# Altium PCB Tigershark-Panel.PcbDoc
Units mil, origin at the board's own origin, x right, y up, seen from the top; angles counter-clockwise.
Board outline 6013.97 x 9713.77 mil, 4 copper layers (Top Layer, Groun Plane, Power Plane, Bottom Layer), stack 64.208 mil thick; 8 components, 0 nets, 12 pads, 0 vias.
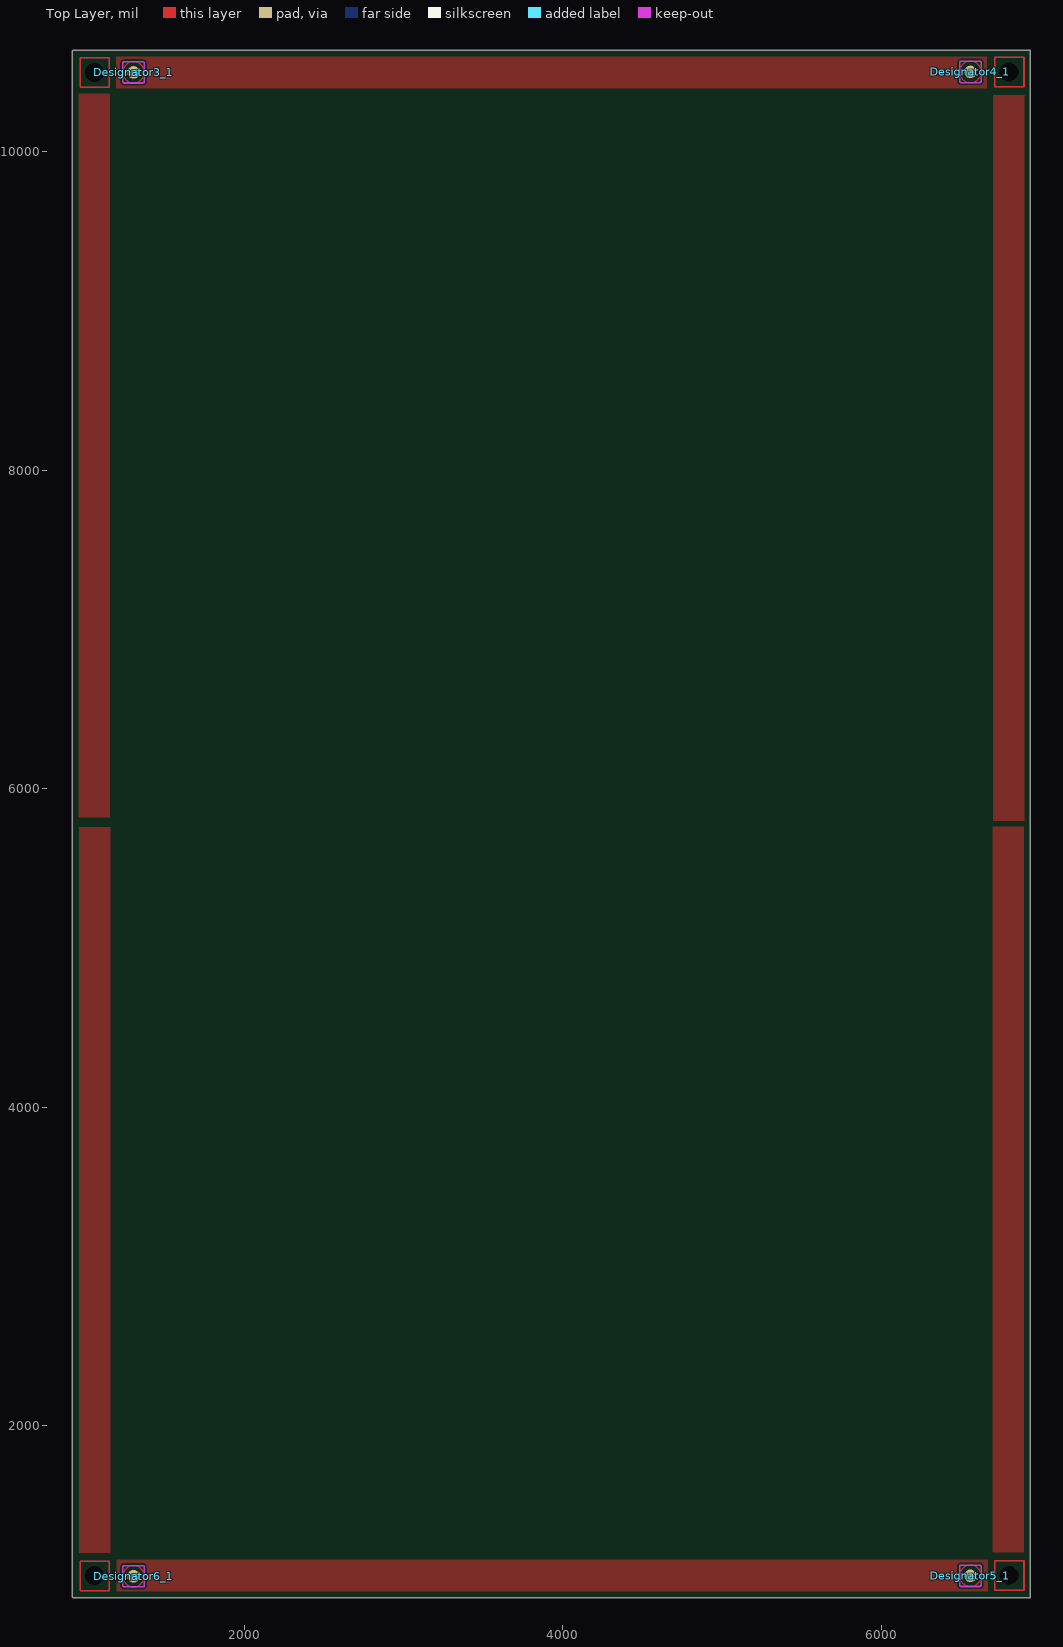
[diagram p0: Top Layer view]
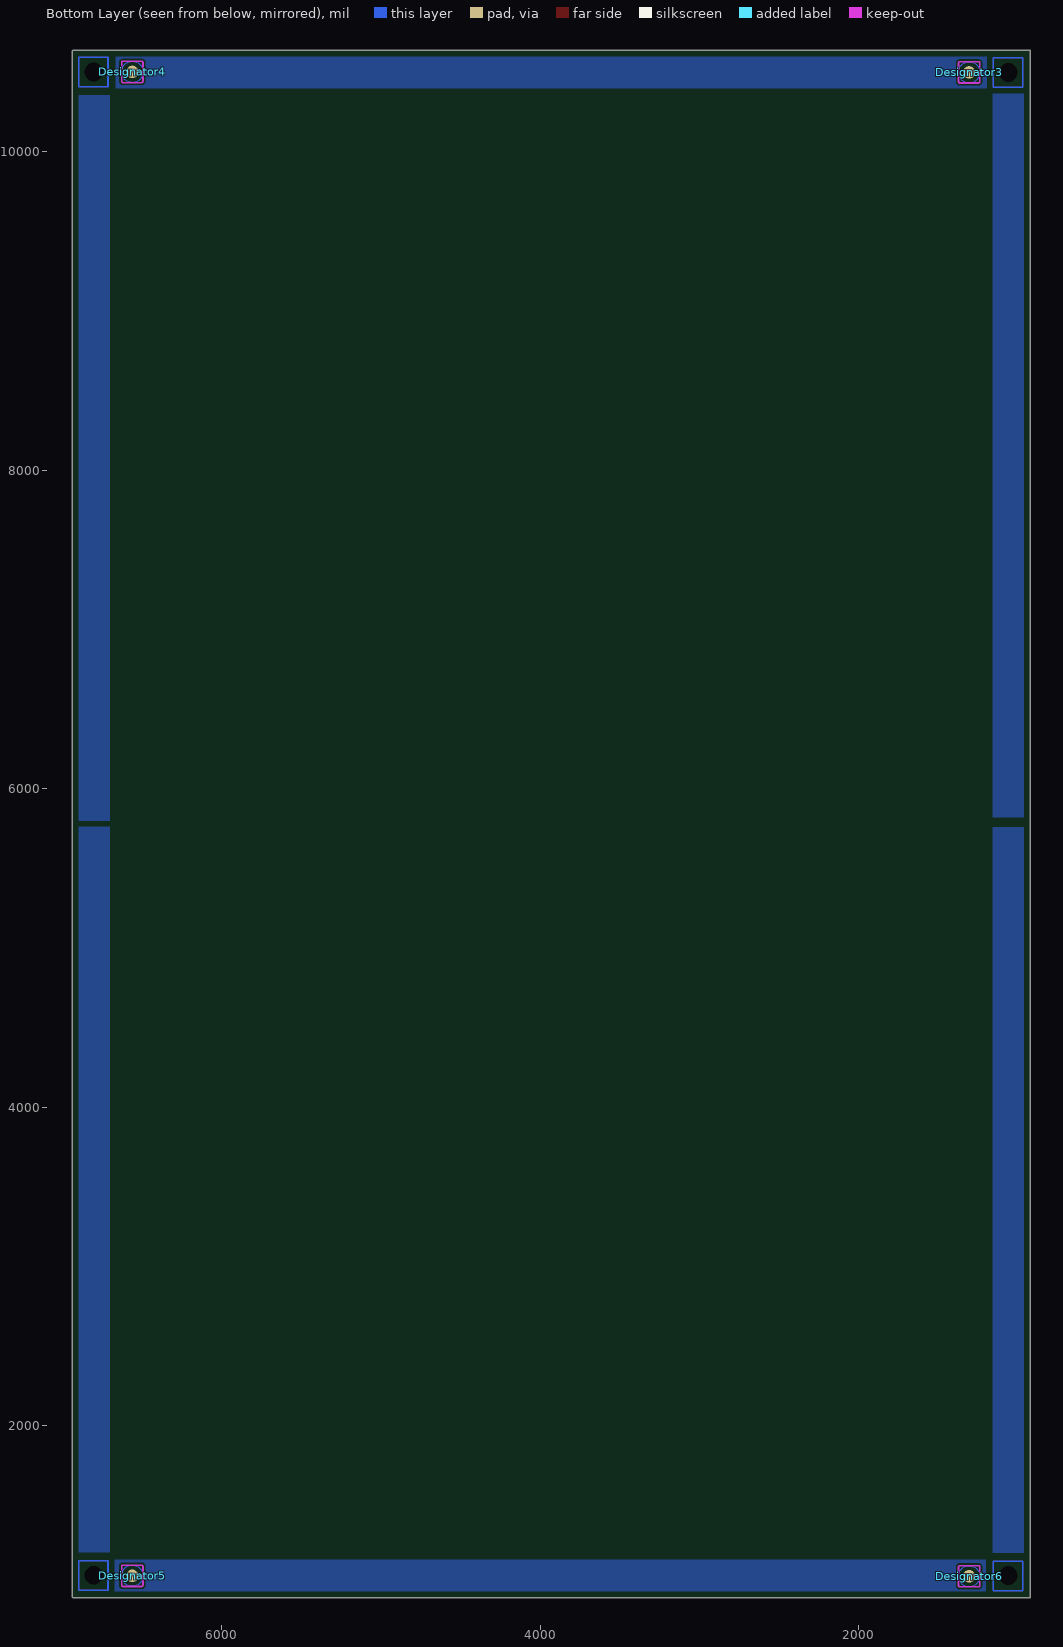
[diagram p1: Bottom Layer view, seen from below]
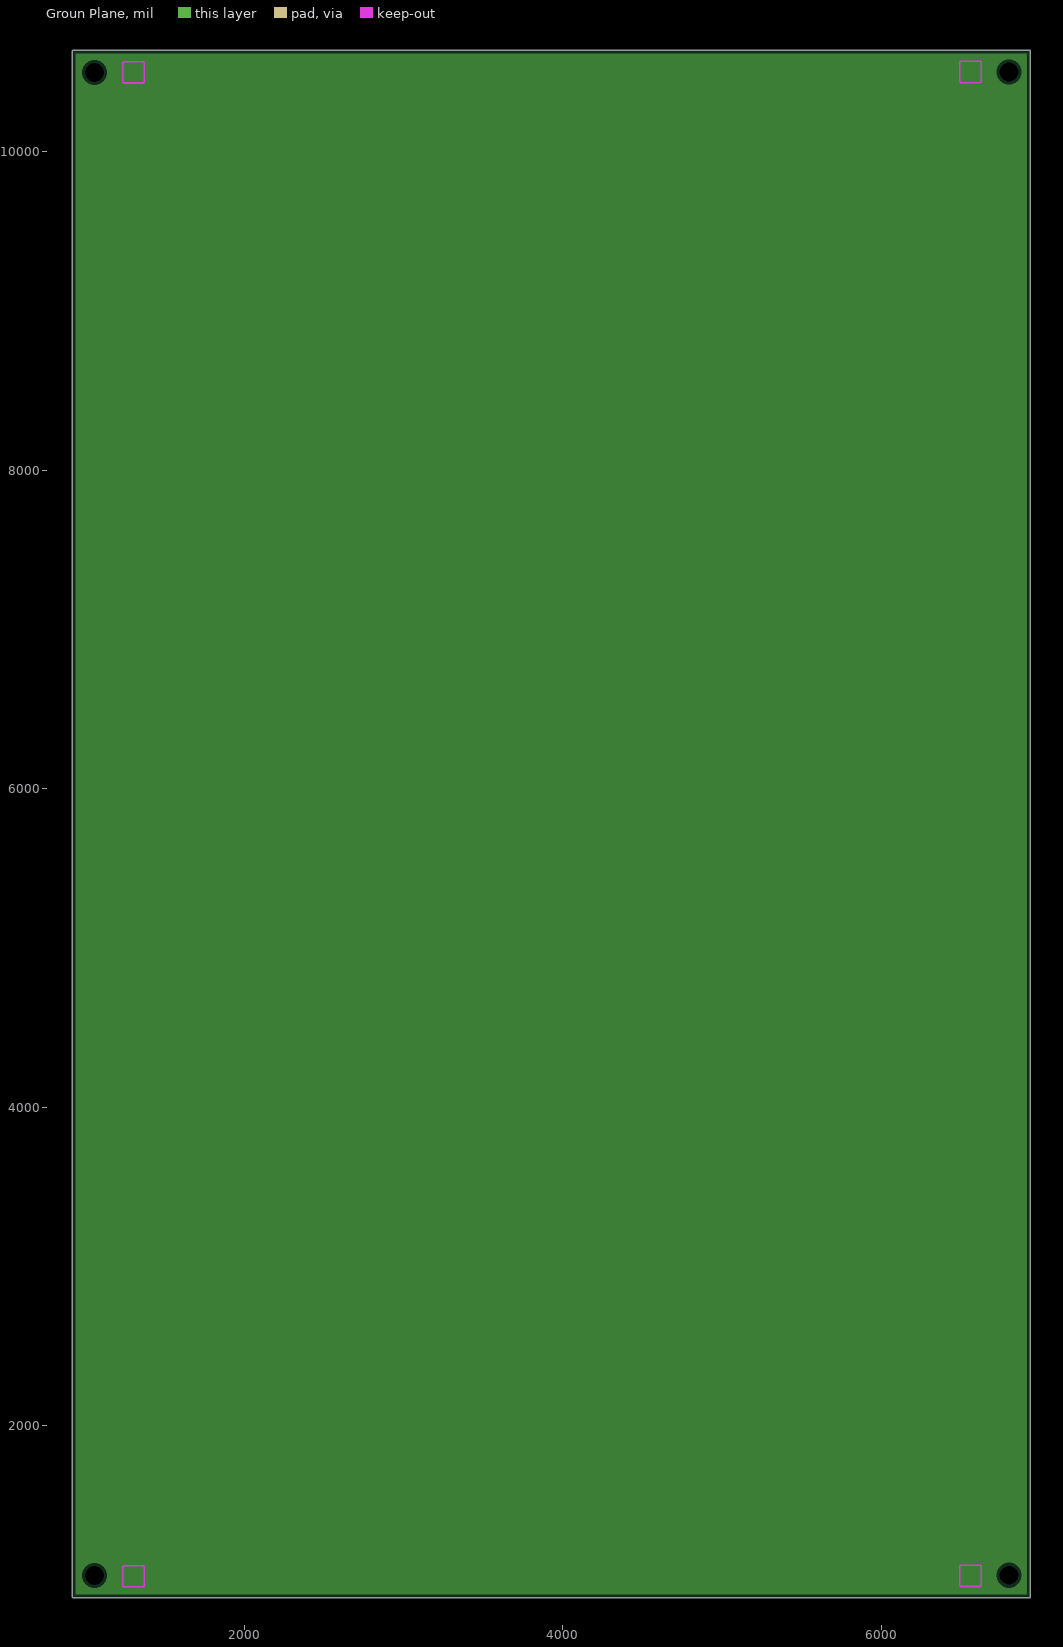
[diagram p2: Groun Plane, clearances drawn from the general rule]
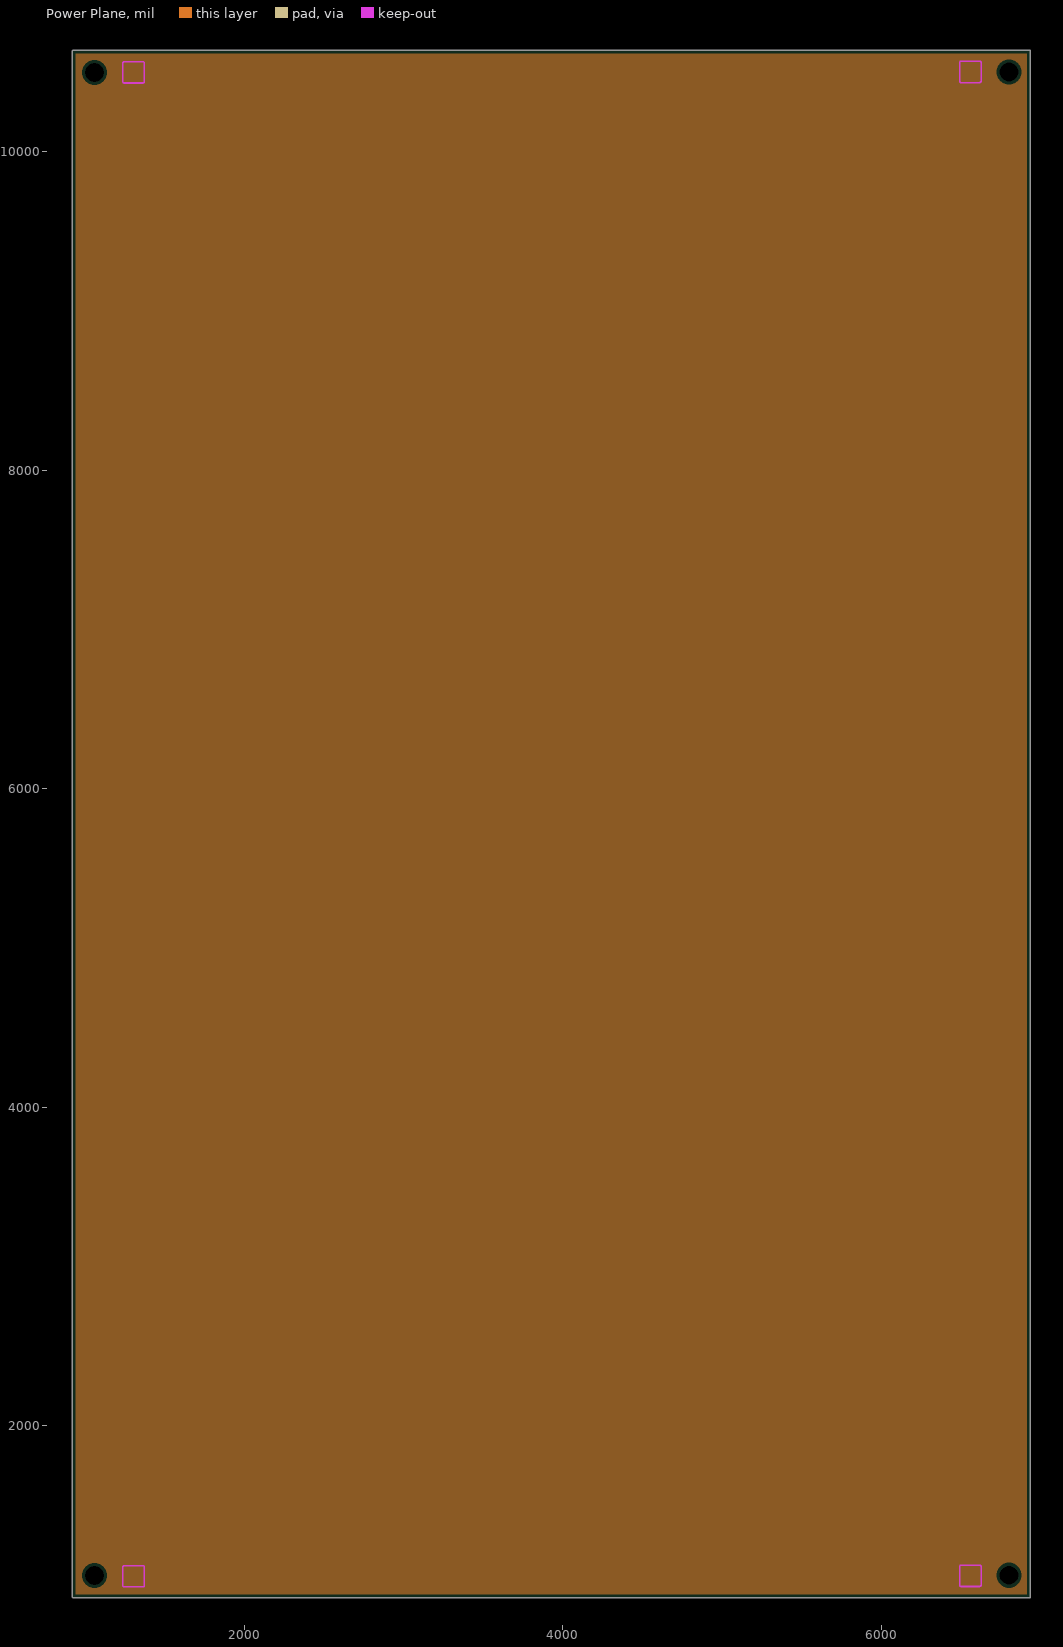
[diagram p3: Power Plane, clearances drawn from the general rule]

## Layer stack, top to bottom
Top Solder: solder mask 0.4, Solder Resist, Dk 3.5
Top Layer: signal copper 2.75
Dielectric1: core 21.654, FR-4, Dk 4.8
Groun Plane: plane copper 1.4
Dielectric2: prepreg 12.6, FR-4, Dk 4.3
Power Plane: plane copper 1.4
Dielectric3: core 21.654, FR-4, Dk 4.8
Bottom Layer: signal copper 2.75
Bottom Solder: solder mask 0.4, Solder Resist, Dk 3.5

## Board outline
927.17,922.15 cw(c927.17,927.17) 922.15,927.17 922.15,10630.91 cw(c927.17,10630.91) 927.17,10635.92 6931.1,10635.92 cw(c6931.1,10630.91) 6936.12,10630.91 6936.12,930.12 cw(c6931.1,930.12) 6935.9,928.64 cw(c6931.1,927.17) 6936.12,927.17 cw(c6931.1,927.17) 6931.1,922.15

## Design rules (kind name [scope] priority, off if disabled: settings)
Clearance [All] p1: gap=10
PlaneClearance [All] p1: clearance=20
PlaneConnect [All] p1: planeconnectstyle=Relief reliefexpansion=20 reliefentries=4 reliefconductorwidth=10 reliefairgap=10
PolygonConnect [All] p1: connectstyle=Relief reliefconductorwidth=10 reliefentries=4 polygonreliefangle="90 Angle" airgapwidth=10
RoutingVias [All] p1: holewidth=28 width=50 viastyle="Through Hole" minholewidth=28 minwidth=50 maxholewidth=28 maxwidth=50
SolderMaskExpansion [All] p1: expansion=4
Width [All] p1: maxlimit=10 minlimit=10 preferedwidth=10
27 further rules are at their usual default settings.

## Components (designator, comment, footprint, x,y, rotation, side; value= is the part's Value field where it differs from the comment)
Designator3 "Comment" FIDUCIAL-2X3-PANEL 1306.1,10498.03 r90 bottom
Designator3_1 "Comment" FIDUCIAL-2X3-PANEL 1306.1,10498.03 r90 top
Designator4 "Comment" FIDUCIAL-2X3-PANEL 6560.04,10500.98 r90 bottom
Designator4_1 "Comment" FIDUCIAL-2X3-PANEL 6560.04,10500.98 r90 top
Designator5 "Comment" FIDUCIAL-2X3-PANEL 6560.04,1059.06 r90 bottom
Designator5_1 "Comment" FIDUCIAL-2X3-PANEL 6560.04,1059.06 r90 top
Designator6 "Comment" FIDUCIAL-2X3-PANEL 1306.1,1056.1 r90 bottom
Designator6_1 "Comment" FIDUCIAL-2X3-PANEL 1306.1,1056.1 r90 top

## Footprints (in the part's own frame and the unit in brackets; to place one, negate y for a bottom-side part, rotate by r counter-clockwise, add the part's x,y. Pads: shape width x height; smd on the part's side, far side on the other; paste and mask are expansions set on the pad)
FIDUCIAL-2X3-PANEL [mm]
  rrect100% 2x2 smd paste+0 mask+0.508: 1(0,0)
  Top Layer circle w0.178: c0,0 r1.7
  Keep-Out Layer lines w0.254: -1.5,-1.7 cw(c-1.5,-1.5) -1.7,-1.5 -1.7,1.5 cw(c-1.5,1.5) -1.5,1.7 1.5,1.7 cw(c1.5,1.5) 1.7,1.5 1.7,-1.5 cw(c1.5,-1.5) 1.5,-1.7 -1.5,-1.7
  body extent -1.01,-1.01 1.02,1.01, height 0.02

## Free pads (board coordinates)
  round 0 hole 118.11 unplated paste-3897.64 mask-4.02: 0(1060.04,1060.04) 1(6802.17,1062.99) 2(6802.17,10500.98) 3(1060.04,10498.03)

## Nets (pads, with @x,y where several pads share a name; then routed paths per layer and width w, separated by ;. In a path a pad name is that pad's centre, name@x,y a point inside that pad or via, vN(x,y) a via of type N, cw(c..) or ccw(c..) an arc to the next point about the centre after c; other vN are vias at no path point)
pads on no net: Designator3.1 Designator3_1.1 Designator4.1 Designator4_1.1 Designator5.1 Designator5_1.1 Designator6.1 Designator6_1.1
copper on no net: | length 5921.3
  Top Layer w10: 970.47,965.55 1154.53,965.55 1154.53,1151.57 970.47,1151.57 970.47,965.55 ; 970.47,10403.54 1154.53,10403.54 1154.53,10589.57 970.47,10589.57 970.47,10403.54 ; 6712.6,968.5 6896.65,968.5 6896.65,1154.53 6712.6,1154.53 6712.6,968.5 ; 6712.6,10406.5 6896.65,10406.5 6896.65,10592.52 6712.6,10592.52 6712.6,10406.5
  Bottom Layer w10: 970.47,965.55 1154.53,965.55 1154.53,1151.57 970.47,1151.57 970.47,965.55 ; 970.47,10403.54 1154.53,10403.54 1154.53,10589.57 970.47,10589.57 970.47,10403.54 ; 6712.6,968.5 6896.65,968.5 6896.65,1154.53 6712.6,1154.53 6712.6,968.5 ; 6712.6,10406.5 6896.65,10406.5 6896.65,10592.52 6712.6,10592.52 6712.6,10406.5

## Polygon pours and split planes (outlines as drawn)
no net on Top Layer "Frame-Copper" (solid, pour order 31): 6896.65,10353.35 6896.65,5800.2 6944.88,5800.2 6702.76,5800.2 6702.76,10353.35
no net on Top Layer "Frame-Copper" (solid, pour order 31): 6895.67,5760.83 6895.67,1207.68 6943.9,1207.68 6701.77,1207.68 6701.77,5760.83
no net on Top Layer "Frame-Copper" (solid, pour order 33): 1158.46,5760 1158.46,1204.72 1206.69,1204.72 964.57,1204.72 964.57,5760
no net on Top Layer "Frame-Copper" (solid, pour order 21): 1196.85,10397.64 6662.4,10397.64 6662.4,10597.44 1196.85,10597.44
no net on Top Layer "Frame-Copper" (solid, pour order 27): 1200.79,960.63 6669.29,960.63 6669.29,1160.43 1200.79,1160.43
no net on Top Layer "Frame-Copper" (solid, pour order 36): 1156.5,10363.19 1156.5,5820 1204.72,5820 962.6,5820 962.6,10363.19
no net on Bottom Layer "Frame-Copper" (solid, pour order 31): 6895.67,5760.83 6895.67,1207.68 6943.9,1207.68 6701.77,1207.68 6701.77,5760.83
no net on Bottom Layer "Frame-Copper" (solid, pour order 31): 6896.65,10353.35 6896.65,5800.2 6944.88,5800.2 6702.76,5800.2 6702.76,10353.35
no net on Bottom Layer "Frame-Copper" (solid, pour order 21): 1196.85,10397.64 6662.4,10397.64 6662.4,10597.44 1196.85,10597.44
no net on Bottom Layer "Frame-Copper" (solid, pour order 36): 1156.5,10363.19 1156.5,5820 1204.72,5820 962.6,5820 962.6,10363.19
no net on Bottom Layer "Frame-Copper" (solid, pour order 33): 1158.46,5760 1158.46,1204.72 1206.69,1204.72 964.57,1204.72 964.57,5760
no net on Bottom Layer "Frame-Copper" (solid, pour order 27): 1200.79,960.63 6669.29,960.63 6669.29,1160.43 1200.79,1160.43
no net on Groun Plane (split plane): 6916.02,942.25 942.25,942.25 942.25,10615.82 6916.02,10615.82
no net on Power Plane (split plane): 6916.02,942.25 942.25,942.25 942.25,10615.82 6916.02,10615.82

## Silkscreen, mask and mechanical layers (free items; w line width, h text height)
Mechanical 2:
  drawing of 347 lines, arcs and shapes, not listed
  text "Notes" at 12559.8,8996.26 h60
  text "Layer" at 8025.93,8988.03 h60
  text "Name" at 8435.84,8988.03 h60
  text "Material" at 9365.59,8988.03 h60
  text "Thickness" at 10225.35,8988.03 h60
  text "Constant" at 10875.19,8988.03 h60
  text "Board Layer Stack" at 11445.05,8988.03 h60
  text "File" at 7719.8,8976.26 h60
  text "1" at 8025.93,8868.03 h60
  text "Top Paste" at 8435.84,8868.03 h60
  text "GTP" at 7739.8,8856.26 h60
  text "2" at 8025.93,8748.03 h60
  text "Top Overlay" at 8435.84,8748.03 h60
  text "GTO" at 7739.8,8736.26 h60
  text "3" at 8025.93,8628.03 h60
  text "Top Solder" at 8435.84,8628.03 h60
  text "Solder Resist" at 9365.59,8628.03 h60
  text "0.010mm" at 10225.35,8628.03 h60
  text "3.5" at 10875.19,8628.03 h60
  text "GTS" at 7739.8,8616.26 h60
  text "4" at 8025.93,8508.03 h60
  text "Top Layer" at 8435.84,8508.03 h60
  text "Copper" at 9365.59,8508.03 h60
  text "0.070mm" at 10225.35,8508.03 h60
  text "GTL" at 7739.8,8496.26 h60
  text "5" at 8025.93,8388.03 h60
  text "Dielectric1" at 8435.84,8388.03 h60
  text "FR-4" at 9365.59,8388.03 h60
  text "0.550mm" at 10225.35,8388.03 h60
  text "4.8" at 10875.19,8388.03 h60
  text "Negative Layer" at 12539.8,8276.26 h60
  text "6" at 8025.93,8268.03 h60
  text "Groun Plane" at 8435.84,8268.03 h60
  text "Copper" at 9365.59,8268.03 h60
  text "0.036mm" at 10225.35,8268.03 h60
  text "GP1" at 7739.8,8256.26 h60
  text "7" at 8025.93,8148.03 h60
  text "Dielectric2" at 8435.84,8148.03 h60
  text "FR-4" at 9365.59,8148.03 h60
  text "0.320mm" at 10225.35,8148.03 h60
  text "4.3" at 10875.19,8148.03 h60
  text "8" at 8025.93,8028.03 h60
  text "Power Plane" at 8435.84,8028.03 h60
  text "Copper" at 9365.59,8028.03 h60
  text "0.036mm" at 10225.35,8028.03 h60
  text "G1" at 7739.8,8016.26 h60
  text "9" at 8025.93,7908.03 h60
  text "Dielectric3" at 8435.84,7908.03 h60
  text "FR-4" at 9365.59,7908.03 h60
  text "0.550mm" at 10225.35,7908.03 h60
  text "4.8" at 10875.19,7908.03 h60
  text "GBL" at 7739.8,7796.26 h60
  text "10" at 8025.93,7788.03 h60
  text "Bottom Layer" at 8435.84,7788.03 h60
  text "Copper" at 9365.59,7788.03 h60
  text "0.070mm" at 10225.35,7788.03 h60
  text "11" at 8025.93,7668.03 h60
  text "Bottom Solder" at 8435.84,7668.03 h60
  text "Solder Resist" at 9365.59,7668.03 h60
  text "0.010mm" at 10225.35,7668.03 h60
  text "3.5" at 10875.19,7668.03 h60
  text "GBS" at 7739.8,7656.26 h60
  text "12" at 8025.93,7548.03 h60
  text "Bottom Overlay" at 8435.84,7548.03 h60
  text "13" at 8025.93,7428.03 h60
  text "Bottom Paste" at 8435.84,7428.03 h60
Drill Drawing:
  drawing of 158 lines, arcs and shapes, not listed
  text "Symbol" at 8004.97,7024.61 h72
  text "Hit Count" at 8510.85,7024.61 h72
  text "Finished Hole Size" at 9208.66,7024.61 h72
  text "Plated" at 10554.27,7024.61 h72
  text "Hole Type" at 11060.14,7024.61 h72
  text "4" at 8510.85,6874.61 h60
  text "0.900mm (35.43mil)" at 9208.66,6874.61 h60
  text "PTH" at 10554.27,6874.61 h60
  text "Round" at 11060.14,6874.61 h60
  text "4" at 8510.85,6724.61 h60
  text "1.499mm (59.00mil)" at 9208.66,6724.61 h60
  text "PTH" at 10554.27,6724.61 h60
  text "Round" at 11060.14,6724.61 h60
  text "4" at 8510.85,6574.61 h60
  text "2.210mm (87.00mil)" at 9208.66,6574.61 h60
  text "PTH" at 10554.27,6574.61 h60
  text "Round" at 11060.14,6574.61 h60
  text "4" at 8510.85,6424.61 h60
  text "3.000mm (118.11mil)" at 9208.66,6424.61 h60
  text "NPTH" at 10554.27,6424.61 h60
  text "Round" at 11060.14,6424.61 h60
  text "8" at 8510.85,6274.61 h60
  text "0.965mm (38.00mil)" at 9208.66,6274.61 h60
  text "PTH" at 10554.27,6274.61 h60
  text "Round" at 11060.14,6274.61 h60
  text "20" at 8510.85,6124.61 h60
  text "0.711mm (28.00mil)" at 9208.66,6124.61 h60
  text "PTH" at 10554.27,6124.61 h60
  text "Round" at 11060.14,6124.61 h60
  text "28" at 8510.85,5974.61 h60
  text "1.397mm (55.00mil)" at 9208.66,5974.61 h60
  text "PTH" at 10554.27,5974.61 h60
  text "Round" at 11060.14,5974.61 h60
  text "32" at 8510.85,5824.61 h60
  text "2.540mm (100.00mil)" at 9208.66,5824.61 h60
  text "PTH" at 10554.27,5824.61 h60
  text "Round" at 11060.14,5824.61 h60
  text "38" at 8510.85,5674.61 h60
  text "0.508mm (20.00mil)" at 9208.66,5674.61 h60
  text "PTH" at 10554.27,5674.61 h60
  text "Round" at 11060.14,5674.61 h60
  text "104" at 8510.85,5524.61 h60
  text "1.016mm (40.00mil)" at 9208.66,5524.61 h60
  text "PTH" at 10554.27,5524.61 h60
  text "Round" at 11060.14,5524.61 h60
  text "120" at 8510.85,5374.61 h60
  text "0.559mm (22.00mil)" at 9208.66,5374.61 h60
  text "PTH" at 10554.27,5374.61 h60
  text "Round" at 11060.14,5374.61 h60
  text "150" at 8510.85,5224.61 h60
  text "0.200mm (7.87mil)" at 9208.66,5224.61 h60
  text "PTH" at 10554.27,5224.61 h60
  text "Round" at 11060.14,5224.61 h60
  text "2258" at 8510.85,5074.61 h60
  text "0.381mm (15.00mil)" at 9208.66,5074.61 h60
  text "PTH" at 10554.27,5074.61 h60
  text "Round" at 11060.14,5074.61 h60
  text "2774 Total" at 8510.85,4924.61 h60
Mechanical 30:
  lines w10: 942.91,942.91 942.91,7064.96 ; 6931.1,927.17 927.17,927.17 927.17,10630.91 6931.1,10630.91 6931.1,930.12
Mechanical 31:
  lines w10: 927.17,1177.17 6930.12,1177.17 ; 927.17,5781.1 6931.1,5781.1 ; 930.12,10380.91 6936.02,10380.91 ; 1177.17,931.1 1177.17,10630.91 ; 6681.1,931.1 6681.1,10630.91

## Dimensions
927.17,927.17 to 6931.1,927.17 on Mechanical 16
6931.1,930.12 to 6931.1,10630.91 on Mechanical 16

## Panel: embedded boards
"..\Tigershark3D\PCB\Tigershark 3D R1.8.PcbDoc" at 1181.1,1181.1, 2 rows x 1 columns, spacing 4600 x 4137.8, rotation 0